# Allegro board MB1046.brd
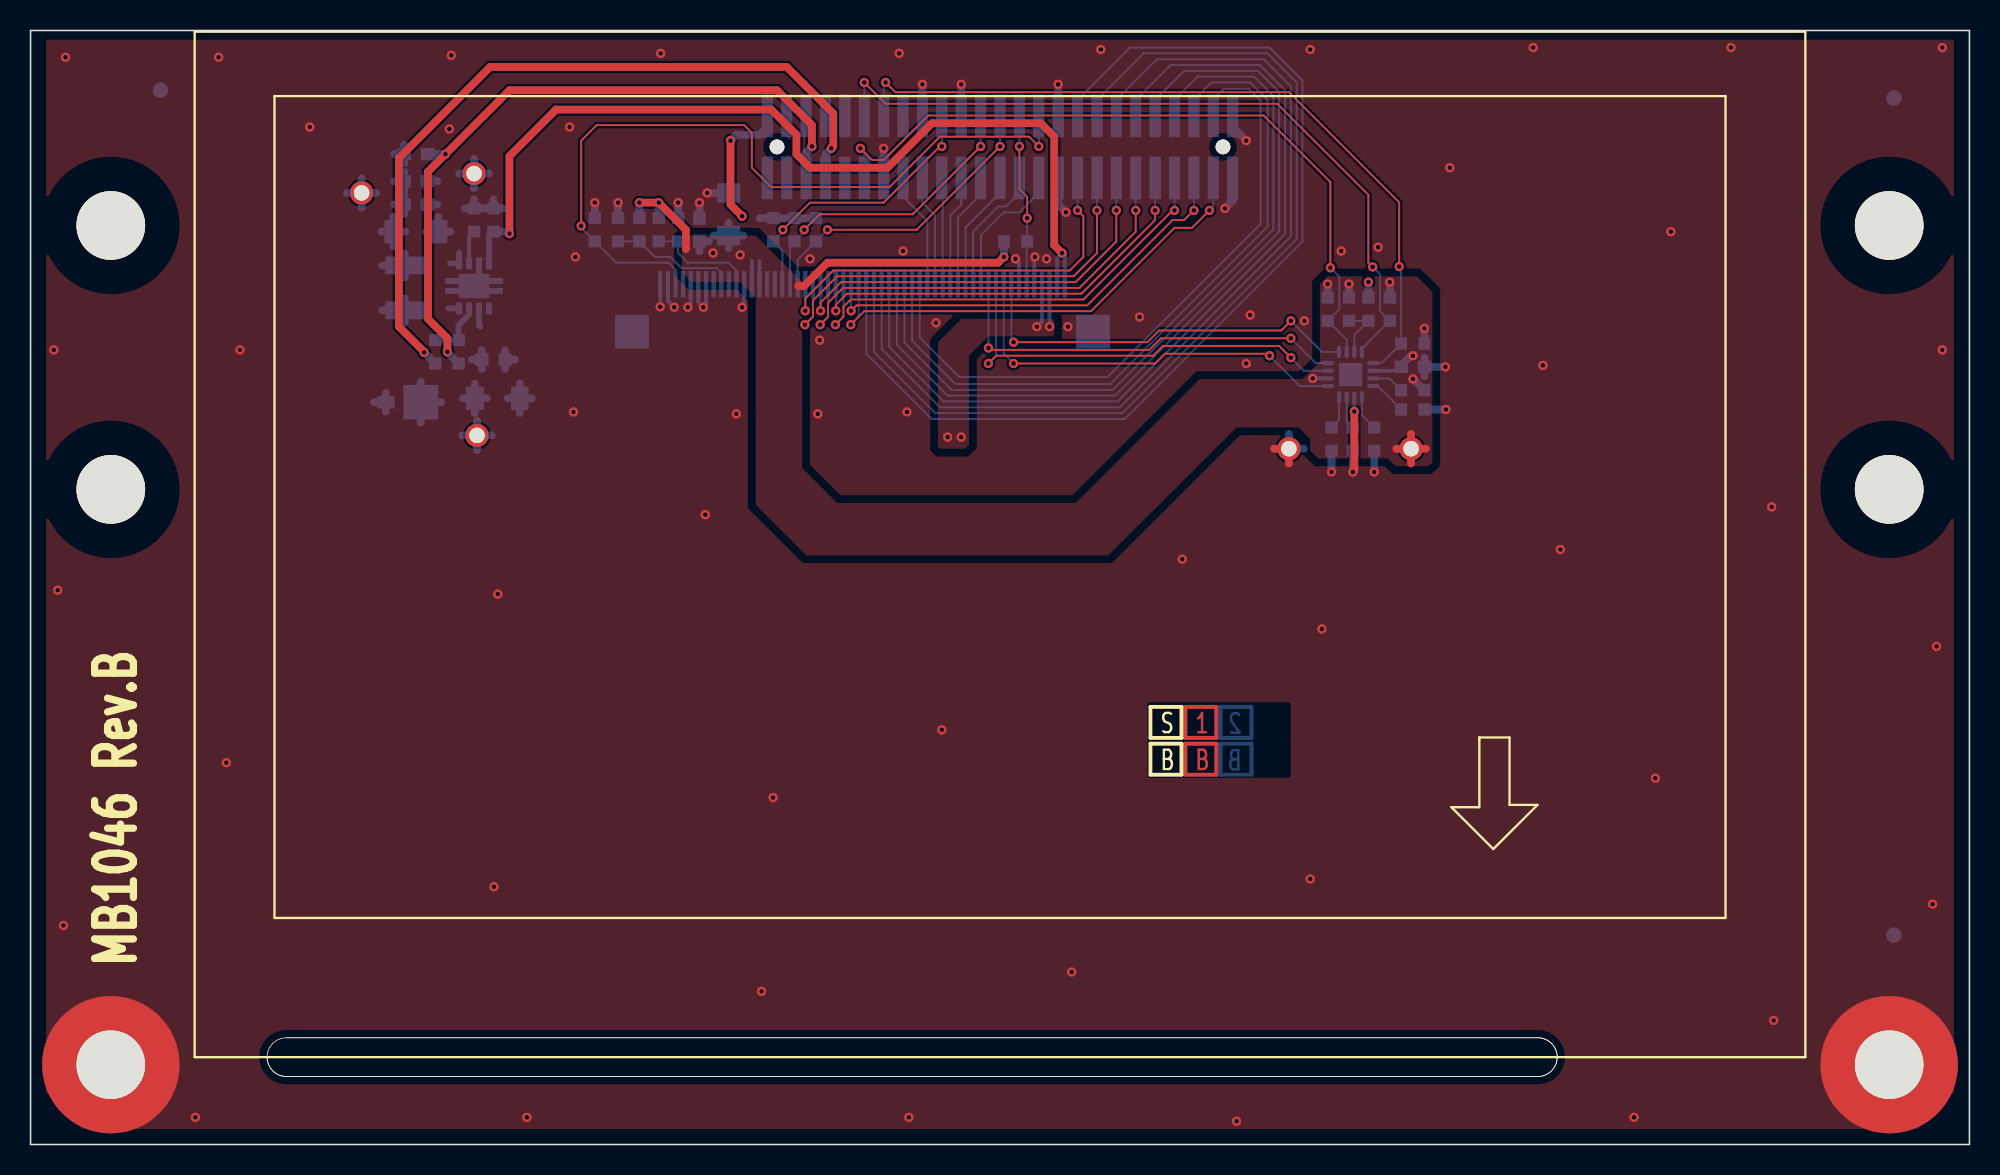
[diagram p0: board, top side]
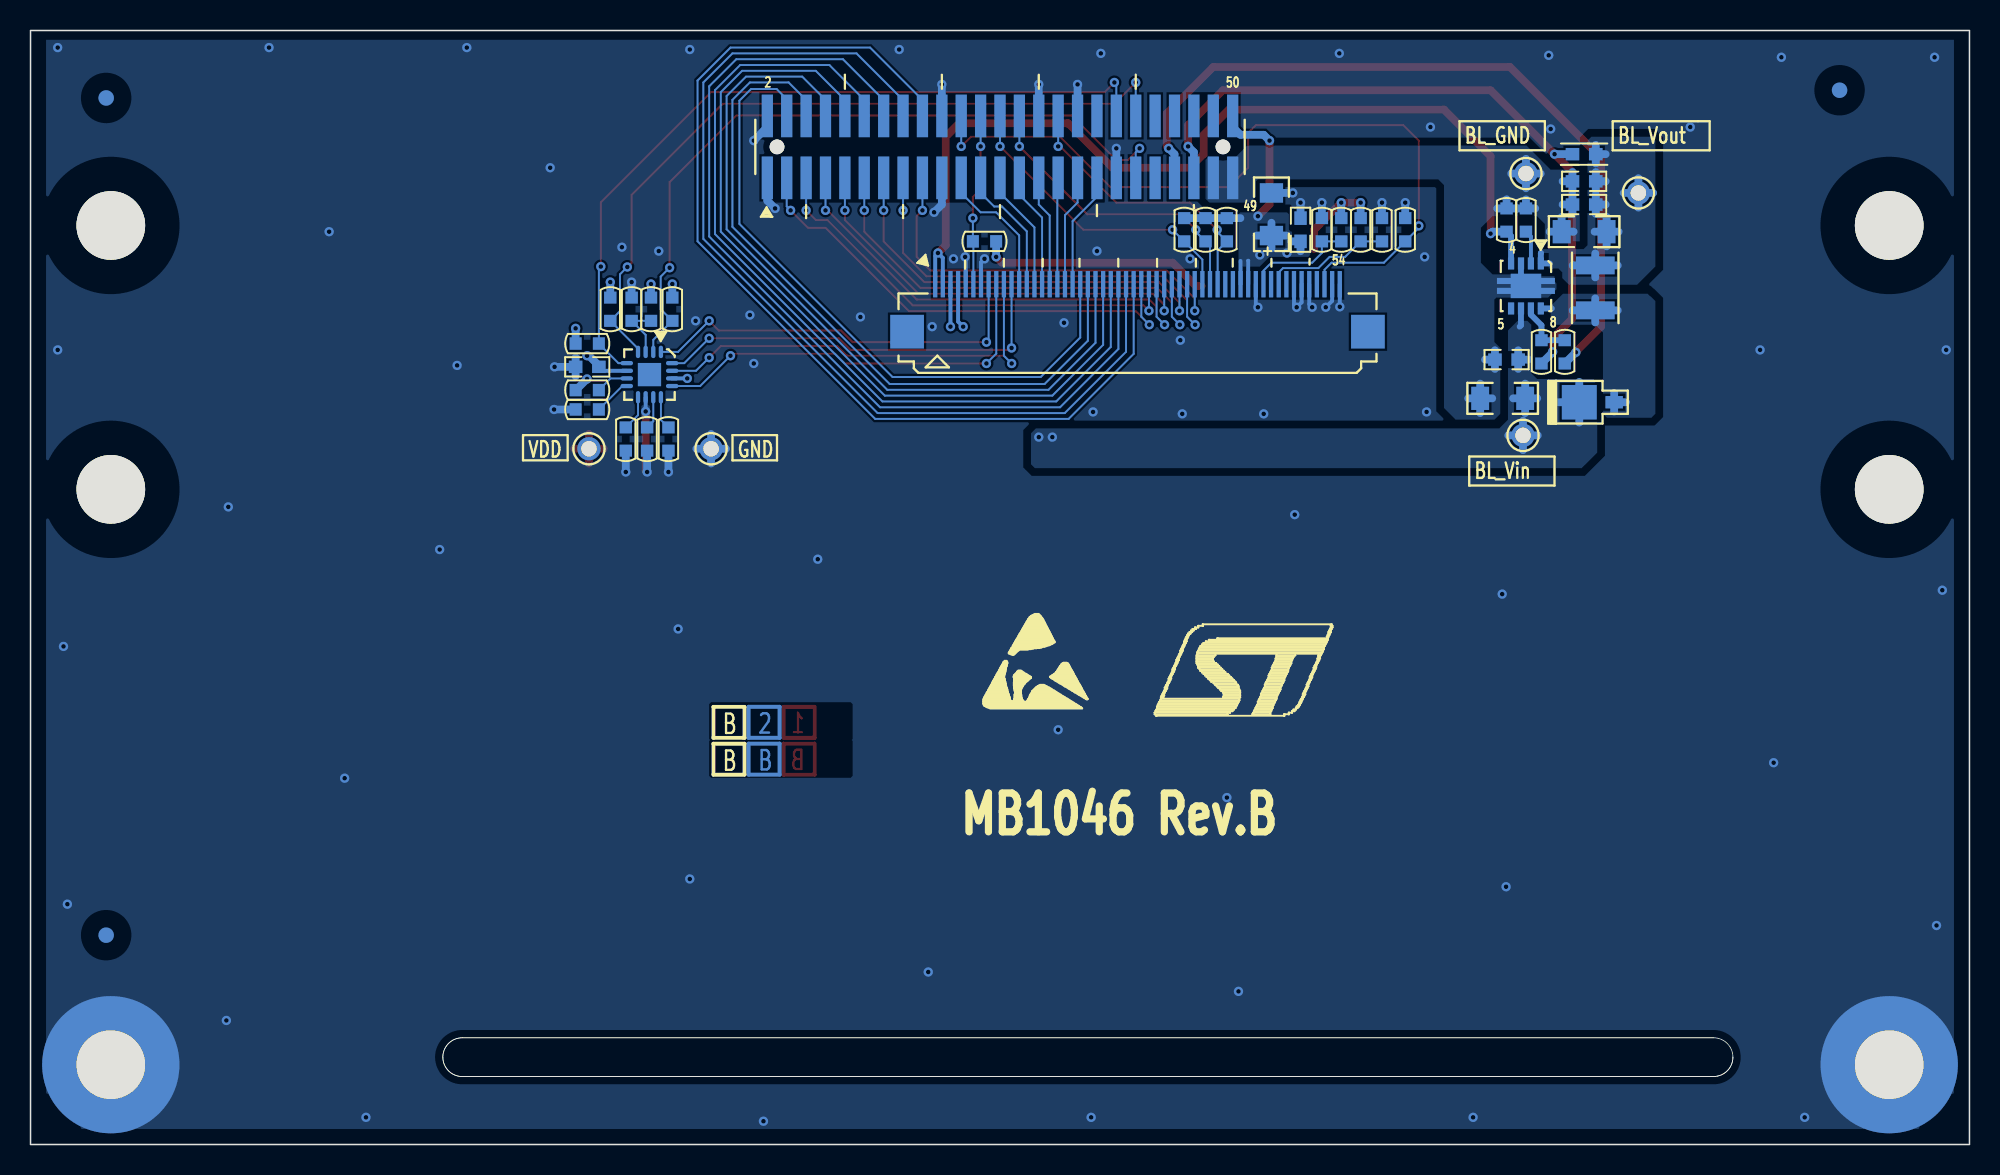
[diagram p1: board, bottom side, seen from below]

Outline 127 x 73 mm; copper layers: TOP, BOTTOM. Coordinates in mm from the lower left corner of the outline.
Outline path: rectangle 0,0 127,73 ; 15.49,5.72 arc(15.87,6.62) 16.76,6.99 ; 15.49,5.72 arc(15.87,4.83) 16.76,4.45 ; 15.49,5.72 arc(15.87,4.83) 16.76,4.45 ; 16.76,6.99 98.72,6.99 ; 16.76,6.99 98.72,6.99 ; 98.72,6.99 arc(99.62,6.62) 99.99,5.72 ; 98.72,6.99 arc(99.62,6.62) 99.99,5.72 ; 16.76,4.45 98.72,4.45 ; 16.76,4.45 98.72,4.45 ; 98.72,4.45 arc(99.62,4.83) 99.99,5.72 ; 98.72,4.45 arc(99.62,4.83) 99.99,5.72 ; 0,73 127,73 127,0 0,0 0,73

## Placement (name value [footprint] x y rotation side)
C1  4.7uF  [TAN-A]  45.72 60.96 270 bottom
C2  100nF  [0603C]  43.81 59.94 270 bottom
C3  4.7uF_50V  [1206C]  30.57 48.9 0 bottom
C4  10nF  [0603C]  30.32 51.44 180 bottom
C5  100nF  [0603C]  25.24 63.12 180 bottom
C6  10nF  [0603C]  25.24 61.59 180 bottom
C7  4.7uF_10V  [1206C]  25.24 59.82 0 bottom
C8  100nF  [0603C]  90.54 50.96 0 bottom
CN1  089H54-000000-G2-C  [FPC54_0R5_089H54_LY-FPC]  67.74 56.52 180 bottom
CN2  P127B-2_25MGF-079-1A  [FTSH-125-01-F-DV]  63.5 65.37 180 bottom
H1  POSITION HOLE  [HOLE_C9D4R5]  121.74 5.23 0 top
H2  POSITION HOLE  [HOLE_C9D4R5]  5.26 5.23 0 top
L1  BEAD  [0603L]  25.24 64.9 180 bottom
L2  4.7uH(1A)  [L1210]  24.51 56.13 270 bottom
NOREF  -  []  74.17 24.54 0 top
NOREF#2  -  []  4.06 -24.89 0 top
NOREF#3  Value  []  63.5 39.32 0 top
NOREF#4  -  [unnamed#2]  121.74 60.23 0 top
NOREF#5  -  [unnamed#2]  121.74 42.93 0 top
NOREF#6  -  []  371.09 -81.28 0 top
NOREF#7  -  [unnamed#2]  5.26 60.23 0 top
NOREF#8  -  []  0 0 0 top
NOREF#9  -  []  256.16 131.06 0 top
NOREF#10  -  []  74.17 26.95 0 top
NOREF#11  -  [unnamed#2]  5.26 42.93 0 top
NOREF#12  -  []  246 77.72 0 top
NOREF#13  -  [unnamed#3]  122.05 68.58 180 bottom
NOREF#14  -  [unnamed#3]  122.05 13.72 180 bottom
NOREF#15  -  [unnamed#3]  8.51 69.09 180 bottom
R1  4K7  [0603R]  48.64 59.94 270 bottom
R2  4K7  [0603R]  51.44 59.94 270 bottom
R3  4K7  [0603R]  50.04 59.94 270 bottom
R4  4K7  [0603R]  41.15 59.94 270 bottom
R5  4K7  [0603R]  39.88 59.94 270 bottom
R6  [N_A]  [0603R]  42.42 59.94 90 bottom
R7  [N_A]  [0603R]  38.48 59.94 90 bottom
R8  4K7  [0603R]  36.96 59.94 90 bottom
R9  4K7  [0603R]  64.52 59.18 0 bottom
R10  0  [0603R]  26.51 51.94 270 bottom
R11  100K  [0603R]  29.05 60.58 90 bottom
R12  10  [0603R]  30.32 60.58 270 bottom
R13  4K7  [0603R]  28.03 51.94 270 bottom
R14  [N_A]  [0603R]  90.54 52.48 0 bottom
R15  [N_A]  [0603R]  89.03 54.74 90 bottom
R16  4K7  [0603R]  84.96 54.74 270 bottom
R17  100K  [0603R]  85.22 46.23 90 bottom
R18  100K  [0603R]  86.61 46.23 90 bottom
R19  4K7  [0603R]  90.54 49.44 0 bottom
R20  100K  [0603R]  88.01 46.23 90 bottom
R21  [N_A]  [0603R]  86.36 54.74 90 bottom
R22  100K  [0603R]  90.54 48.17 180 bottom
R23  4K7  [0603R]  87.63 54.74 270 bottom
TP1  mco1  [TP]  82.42 45.59 180 bottom
TP2  mco1  [TP]  29.05 63.63 90 bottom
TP3  mco1  [TP]  90.42 45.59 0 bottom
TP4  mco1  [TP]  29.24 46.47 90 bottom
TP5  mco1  [TP]  21.68 62.36 90 bottom
U1  STLD40DPUR  [SON8_0R65_3X3]  29.05 56.26 0 bottom
U2  STMPE811QTR  [QFN16_0R5_3X3]  86.46 50.45 270 bottom
Z1  STPS1L40M  [DO-216AA]  23.27 48.64 0 bottom

## Library data of the parts
C1 = TAN-A
C2 C4-C6 C8 = 0603C
C3 C7 = 1206C
CN1 = FPC54_0R5_089H54_LY-FPC
CN2 = FTSH-125-01-F-DV
H1 H2 = HOLE_C9D4R5
L1 = 0603L
L2 = L1210
R1-R23 = 0603R
TP1-TP5 = TP
U1 = SON8_0R65_3X3
U2 = QFN16_0R5_3X3
Z1 = DO-216AA

## Footprints (pads in the part's own frame, mm; a bottom-side part is the same pattern mirrored in y, then rotated)
0603C
  rect 0.889x0.813 smd: 1(-0.762,0) 2(0.762,0)
0603L
  rect 0.889x0.813 smd: 1(-0.762,0) 2(0.762,0)
0603R
  rect 0.787x0.813 smd: 1(-0.762,0) 2(0.762,0)
1206C
  rect 1.168x1.524 smd: 1(-1.473,0) 2(1.473,0)
DO-216AA
  rect 1.143x0.813 smd: 1(0,0)
  rect 2.286x2.261 smd: 2(2.286,0)
FPC54_0R5_089H54_LY-FPC
  rect 0.279x1.727 smd: 1(0,-0.14) 2(0.5,-0.14) 3(1,-0.14) 4(1.5,-0.14) 5(2,-0.14) 6(2.5,-0.14) 7(3,-0.14) 8(3.5,-0.14) 9(4,-0.14) 10(4.5,-0.14) 11(5,-0.14) 12(5.5,-0.14) 13(6,-0.14) 14(6.5,-0.14) 15(7,-0.14) 16(7.5,-0.14) 17(8,-0.14) 18(8.5,-0.14) 19(9,-0.14) 20(9.5,-0.14) 21(10,-0.14) 22(10.5,-0.14) 23(11,-0.14) 24(11.5,-0.14) 25(12,-0.14) 26(12.5,-0.14) 27(13,-0.14) 28(13.5,-0.14) 29(14,-0.14) 30(14.5,-0.14) 31(15,-0.14) 32(15.5,-0.14) 33(16,-0.14) 34(16.5,-0.14) 35(17,-0.14) 36(17.5,-0.14) 37(18,-0.14) 38(18.5,-0.14) 39(19,-0.14) 40(19.5,-0.14) 41(20,-0.14) 42(20.5,-0.14) 43(21,-0.14) 44(21.5,-0.14) 45(22,-0.14) 46(22.5,-0.14) 47(23,-0.14) 48(23.5,-0.14) 49(24,-0.14) 50(24.5,-0.14) 51(25,-0.14) 52(25.5,-0.14) 53(26,-0.14) 54(26.5,-0.14)
  rect 2.21x2.21 smd: 55(-1.843,-3.25) 56(28.343,-3.25)
FTSH-125-01-F-DV
  round 0.965 hole 0.965 unplated: (-14.605,0) (14.605,0)
  rect 0.737x2.794 smd: 1(-15.24,-2.03) 2(-15.24,2.03) 3(-13.97,-2.03) 4(-13.97,2.03) 5(-12.7,-2.03) 6(-12.7,2.03) 7(-11.43,-2.03) 8(-11.43,2.03) 9(-10.16,-2.03) 10(-10.16,2.03) 11(-8.89,-2.03) 12(-8.89,2.03) 13(-7.62,-2.03) 14(-7.62,2.03) 15(-6.35,-2.03) 16(-6.35,2.03) 17(-5.08,-2.03) 18(-5.08,2.03) 19(-3.81,-2.03) 20(-3.81,2.03) 21(-2.54,-2.03) 22(-2.54,2.03) 23(-1.27,-2.03) 24(-1.27,2.03) 25(0,-2.03) 26(0,2.03) 27(1.27,-2.03) 28(1.27,2.03) 29(2.54,-2.03) 30(2.54,2.03) 31(3.81,-2.03) 32(3.81,2.03) 33(5.08,-2.03) 34(5.08,2.03) 35(6.35,-2.03) 36(6.35,2.03) 37(7.62,-2.03) 38(7.62,2.03) 39(8.89,-2.03) 40(8.89,2.03) 41(10.16,-2.03) 42(10.16,2.03) 43(11.43,-2.03) 44(11.43,2.03) 45(12.7,-2.03) 46(12.7,2.03) 47(13.97,-2.03) 48(13.97,2.03) 49(15.24,-2.03) 50(15.24,2.03)
HOLE_C9D4R5
  round 8.992 hole 4.496: 1(0,0)
L1210
  rect 1.168x2.54 smd: 1(-1.473,0) 2(1.473,0)
QFN16_0R5_3X3
  oval 0.813x0.279 smd: 1(-1.487,0.75) 2(-1.487,0.25) 3(-1.487,-0.25) 4(-1.487,-0.75) 9(1.487,-0.75) 10(1.487,-0.25) 11(1.487,0.25) 12(1.487,0.75)
  oval 0.279x0.813 smd: 5(-0.75,-1.487) 6(-0.25,-1.487) 7(0.25,-1.487) 8(0.75,-1.487) 13(0.75,1.487) 14(0.25,1.487) 15(-0.25,1.487) 16(-0.75,1.487)
  rect 1.524x1.524 smd: 17(0,0)
SON8_0R65_3X3
  rect 0.406x0.787 smd: 1(-0.975,-1.475) 2(-0.325,-1.475) 3(0.325,-1.475) 4(0.975,-1.475) 5(0.975,1.475) 6(0.325,1.475) 7(-0.325,1.475) 8(-0.975,1.475)
  custom 3.8x1.6 smd: 9(0,0)
TAN-A
  rect 1.27x1.524 smd: 1(1.397,0) 2(-1.397,0)
TP
  round 1.524 hole 1.016: 1(0,0)
unnamed#2
  round 4.496 hole 4.496 unplated: (0,0)
unnamed#3
  round 1.016 smd: (0,0)

## Nets
GND: C1.2 C2.1 C8.2 CN1.5 CN1.7 CN1.43 CN1.48 CN1.49 CN1.50 CN1.53 CN1.54 CN2.1 CN2.2 CN2.19 CN2.20 CN2.30 CN2.34 CN2.37 H1.1 H2.1 R6.2 R7.2 R8.2 R17.1 R18.1 R20.1 R22.1 R23.1 TP1.1 U2.10
VDD: C1.1 C2.2 C8.1 CN1.41 CN1.42 CN2.50 R1.1 R2.1 R3.1 R4.1 R5.1 R9.1 R14.2 R15.2 R16.1 R19.2 R21.2 TP3.1 U2.6 U2.14
A: C3.1 C4.2 CN1.3 CN1.4 TP4.1 U1.6 Z1.2
B0: CN1.12 CN2.21
B1: CN1.13 CN2.23
B2: CN1.14 CN2.25
B3: CN1.15 CN2.27
B4: CN1.16 CN2.29
B5: CN1.17 CN2.31
B6: CN1.18 CN2.33
B7: CN1.19 CN2.35
BL_CTRL: CN2.43 R10.2
BLGND: C3.2 C4.1 C5.1 C6.1 C7.2 CN2.47 CN2.49 R11.2 R12.1 TP2.1 U1.3 U1.9
BLVDD: CN2.45 L1.1 R13.2
CLK: CN1.38 CN2.32 R1.2
ENB: CN1.52 CN2.22 R8.1
G0: CN1.20 CN2.4
G1: CN1.21 CN2.6
G2: CN1.22 CN2.8
G3: CN1.23 CN2.10
G4: CN1.24 CN2.12
G5: CN1.25 CN2.14
G6: CN1.26 CN2.16
G7: CN1.27 CN2.18
HSYNC: CN1.36 CN2.26 R2.2
I2C_SCL: CN2.40 R15.1 U2.4
I2C_SDA: CN2.38 R14.1 U2.5
INT: CN2.39 R16.2 U2.2
K: CN1.1 CN1.2 R12.2 U1.4
NETCN1_44: CN1.44 R4.2 R6.1
NETCN1_46: CN1.46 R5.2 R7.1
NETL2_2: L2.2 U1.8 Z1.1
NETR10_1: R10.1 R13.1 U1.7
NETR11_1: R11.1 U1.2
NETR17_2: R17.2 U2.12
NETR18_2: R18.2 U2.11
NETR19_1: R19.1 U2.7
NETR20_2: R20.2 U2.9
NETR21_1: R21.1 R23.2 U2.3
NETR22_2: R22.2 U2.8
ON_OFF: CN1.6 CN2.24 R9.2
R0: CN1.28 CN2.3
R1: CN1.29 CN2.5
R2: CN1.30 CN2.7
R3: CN1.31 CN2.9
R4: CN1.32 CN2.11
R5: CN1.33 CN2.13
R6: CN1.34 CN2.15
R7: CN1.35 CN2.17
VL: C5.2 C6.2 C7.1 L1.2 L2.1 TP5.1 U1.1
VSYNC: CN1.37 CN2.28 R3.2
XL: CN1.11 U2.16
XR: CN1.9 U2.13
YD: CN1.8 U2.1
YU: CN1.10 U2.15

Pads without a net: CN1 39 40 45 47 51 55 56; CN2 36 41 42 44 46 48; U1 5; U2 17

## Via types
v1: diameter 0.61, hole 0.305, TOP to BOTTOM, 151 vias

## Routing (per net, layer and track width the routed paths; a pad name or vN(x,y) marks a point on that pad's centre or on a via; arc(x,y) is an arc through that point)
GND: length 53.3
  TOP w0.508: 82.42,44.63 TP1.1 81.46,45.59 ; v1(86.61,44.07) 86.71,44.16 v1(86.71,48.04)
  BOTTOM w0.254: CN1.7 64.74,57.81 v1(64.52,58.04) ; CN1.54 v1(41.24,54.89) ; CN1.50 43.24,55.06 v1(43.05,54.86) ; v1(42.16,54.86) 41.74,55.28 CN1.53 ; U2.10 v1(86.71,48.04) ; v1(46.61,54.86) 46.74,55 CN1.43 ; CN1.49 43.74,55.19 v1(44.07,54.86) 44.24,55.04 CN1.48 ; v1(65.79,58.17) 65.74,58.12 CN1.5
  BOTTOM w0.508: CN2.37 v1(55.88,65.28) ; CN2.30 v1(60.96,69.47) ; v1(79.63,65.79) 78.74,66.67 CN2.2 ; R22.1 v1(92.71,48.17) ; R7.2 v1(38.48,61.72) ; C2.1 v1(43.81,61.72) ; TP1.1 83.39,45.59 ; TP1.1 82.42,46.56 ; TP1.1 81.46,45.59 ; TP1.1 82.42,44.63 ; R23.1 v1(87.63,56.52) ; R8.2 v1(36.96,61.72) ; R20.1 v1(88.01,44.07) ; CN2.20 v1(67.31,69.47) ; R6.2 v1(42.42,61.72) ; C8.2 91.3,51.57 ; C8.2 91.3,50.35 ; C8.2 v1(92.68,50.96) ; CN2.19 67.31,61.59 v1(67.82,61.09) ; R17.1 v1(85.22,44.07) ; v1(44.32,62.36) C1.2 ; CN2.34 v1(58.42,69.47) ; R18.1 v1(86.61,44.07) ; v1(78.23,61.34) 78.74,61.85 CN2.1
  vias: v1(1.52,52.07) v1(1.78,36.32) v1(2.16,14.35) v1(2.29,71.25) v1(10.79,1.78) v1(12.32,71.25) v1(12.83,25.02) v1(13.72,52.07) v1(18.29,66.67) v1(27.43,66.55) v1(27.56,71.37) v1(30.35,16.89) v1(30.61,36.07) v1(32.51,1.78) v1(35.31,66.67) v1(35.56,48.01) v1(35.69,58.17) v1(41.27,71.5) v1(44.2,41.27) v1(46.23,47.88) v1(47.88,10.03) v1(48.64,22.73) v1(51.05,58.04) v1(51.56,47.88) v1(51.69,52.7) v1(56.9,71.5) v1(57.15,58.55) v1(57.4,48.01) v1(57.53,1.78) v1(59.31,53.85) v1(59.69,27.18) v1(66.55,58.04) v1(67.94,53.59) v1(68.2,11.3) v1(70.1,71.75) v1(72.64,54.23) v1(75.44,38.35) v1(78.99,1.52) v1(79.63,51.18) v1(79.88,54.36) v1(83.44,53.98) v1(83.82,71.75) v1(83.82,17.4) v1(84.58,33.78) v1(85.85,58.55) v1(88.27,58.8) v1(92.96,64.01) v1(98.42,71.88) v1(99.06,51.05) v1(100.2,38.99) v1(105.03,1.78) v1(106.43,24) v1(107.44,59.82) v1(111.38,71.88) v1(114.05,41.78) v1(114.17,8.13) v1(124.59,15.75) v1(124.84,32.64) v1(125.22,71.88) v1(125.22,52.07)
VDD: length 55.5
  TOP w0.508: v1(45.85,65.79) 45.85,61.59 v1(46.61,60.83) ; 89.46,45.59 TP3.1 ; TP3.1 91.39,45.59 ; TP3.1 90.42,46.56 ; TP3.1 90.42,44.63 ; 42.93,58.67 42.93,59.94 v1(41.15,61.72) v1(39.88,61.72) ; 50.29,56.26 50.67,56.26 52.2,57.78 63.37,57.78 v1(63.75,58.17)
  BOTTOM w0.254: 47.24,57.91 CN1.42 ; C8.1 89.52,50.7 U2.6 ; U2.14 v1(83.98,50.2) ; CN1.41 47.74,57.9
  BOTTOM w0.508: CN2.50 48.26,66.67 47.75,66.17 46.23,66.17 v1(45.85,65.79) ; C1.1 45.72,60.4 ; C1.1 45.72,58.72 ; C1.1 46.69,59.56 ; C1.1 44.75,59.56 ; R15.2 v1(89.03,56.52) ; 43.81,58.53 C2.2 44.43,59.18 ; R2.1 R3.1 R1.1 47.75,60.71 ; v1(90.55,50.16) 91.28,49.44 R19.2 ; R9.1 v1(63.75,58.17) ; R14.2 v1(91.3,53.48) ; v1(90.55,51.69) 90.42,51.69 89.77,51.04 C8.1 ; R5.1 v1(39.88,61.72) ; R4.1 v1(41.15,61.72) ; R21.2 v1(86.36,56.39) ; R16.1 v1(84.96,56.39)
  vias: v1(44.7,58.42) v1(46.48,58.29)
A: length 20.2
  BOTTOM w0.254: v1(65.91,53.59) 66.24,53.93 CN1.4 ; CN1.3 v1(66.74,53.59)
  BOTTOM w0.381: 29.46,53.59 29.38,53.68 U1.6
  BOTTOM w0.508: 28.31,48.9 C3.1 ; C3.1 29.89,48.9 ; C3.1 29.1,49.86 ; C3.1 29.1,47.93 ; C4.2 29.56,52.05 ; C4.2 29.56,50.82 ; C4.2 28.91,51.44 ; TP4.1 30.21,46.47 ; TP4.1 29.24,47.43 ; TP4.1 28.28,46.47 ; TP4.1 29.24,45.5 ; Z1.2 26.9,48.64 ; Z1.2 25.56,47.31 ; Z1.2 25.56,49.98
  vias: v1(60.07,46.35) v1(60.96,46.35)
B0: length 9.1
  BOTTOM w0.127: CN2.21 66.04,62.36 64.77,61.09 63.75,61.09 62.24,59.58 CN1.12
B1: length 8.5
  BOTTOM w0.127: CN2.23 64.77,62.36 63.88,61.47 63.37,61.47 61.74,59.84 CN1.13
B2: length 7.9
  BOTTOM w0.127: CN2.25 63.5,62.36 61.24,60.1 CN1.14
B3: length 7.6
  BOTTOM w0.127: CN1.15 60.74,60.74 62.23,62.23 CN2.27
B4: length 7.3
  BOTTOM w0.127: CN2.29 60.96,61.59 60.24,60.88 CN1.16
B5: length 7
  BOTTOM w0.127: CN1.17 59.74,63.29 CN2.31
B6: length 7.3
  BOTTOM w0.127: CN1.18 59.24,60.9 58.42,61.72 CN2.33
B7: length 7.6
  BOTTOM w0.127: CN2.35 57.15,62.1 58.74,60.51 CN1.19
BL_CTRL: length 51.1
  TOP w0.508: v1(52.45,65.28) 52.58,65.41 52.58,67.56 49.53,70.61 30.1,70.61 24.13,64.64 24.13,53.59 25.75,51.98 25.75,51.94 v1(25.78,51.91)
  BOTTOM w0.508: v1(52.45,65.28) 52.07,64.9 CN2.43 ; R10.2 v1(25.78,51.91)
BLGND: length 20.8
  BOTTOM w0.381: U1.9 29.38,56.59 U1.3
  BOTTOM w0.508: C6.1 26.65,61.59 ; C6.1 26,60.98 ; C6.1 26,62.21 ; 28.08,63.63 TP2.1 ; TP2.1 30.02,63.63 ; TP2.1 29.05,64.59 ; TP2.1 29.05,62.66 ; 29.71,61.34 R12.1 ; R12.1 30.93,61.34 ; R12.1 30.32,61.94 ; R11.2 29.66,61.34 ; R11.2 29.05,61.94 ; R11.2 28.44,61.34 ; 32.05,47.93 C3.2 ; C3.2 31.26,48.9 ; C3.2 32.05,49.86 ; C3.2 32.84,48.9 ; 25.93,59.82 C7.2 ; C7.2 26.71,60.78 ; C7.2 27.5,59.82 ; C4.1 31.08,52.05 ; C4.1 31.73,51.44 ; C4.1 31.08,50.82 ; C5.1 26,63.73 ; C5.1 26,62.51 ; C5.1 26.65,63.12
BLVDD: length 46.5
  TOP w0.508: v1(27.3,51.94) 27.3,52.83 26.04,54.1 26.04,63.75 v1(27.18,64.9) 31.37,69.09 48.9,69.09 51.18,66.8 v1(51.18,65.41)
  BOTTOM w0.508: CN2.45 50.8,65.02 v1(51.18,65.41) ; v1(27.3,51.94) 27.3,51.91 R13.2 ; v1(27.18,64.9) L1.1
CLK: length 18.8
  TOP w0.127: v1(49.28,59.94) 51.05,61.72 55.88,61.72 59.56,65.41 v1(59.69,65.41)
  BOTTOM w0.127: CN1.38 49.24,58.58 R1.2 49.28,59.82 v1(49.28,59.94) ; CN2.32 v1(59.69,65.41)
ENB: length 51
  TOP w0.127: v1(36.07,60.2) 36.07,65.79 37.08,66.8 46.74,66.8 47.24,66.29 47.24,64.01 48.51,62.74 56.26,62.74 59.56,66.04 65.41,66.04 v1(66.04,65.41)
  BOTTOM w0.127: CN1.52 42.24,57.32 41.78,57.78 38.35,57.78 R8.1 36.07,60.07 v1(36.07,60.2) ; CN2.22 v1(66.04,65.41)
G0: length 43.9
  BOTTOM w0.127: CN1.20 58.24,52.88 60.83,50.29 70.54,50.29 80.57,60.33 80.57,68.4 79.81,69.16 78.13,69.16 77.47,68.5 CN2.4
G1: length 47.6
  BOTTOM w0.127: CN1.21 57.74,52.67 60.58,49.83 70.73,49.83 81.03,60.14 81.03,68.45 79.88,69.6 77.34,69.6 76.2,68.45 CN2.6
G2: length 51.1
  BOTTOM w0.127: CN1.22 57.24,52.53 60.33,49.45 70.88,49.45 81.41,59.98 81.41,68.71 80.14,69.98 76.45,69.98 74.93,68.45 CN2.8
G3: length 54.5
  BOTTOM w0.127: CN1.23 56.74,52.4 60.07,49.07 71.04,49.07 81.79,59.82 81.79,68.96 80.39,70.36 75.56,70.36 73.66,68.45 CN2.10
G4: length 57.9
  BOTTOM w0.127: CN2.12 72.39,68.45 74.68,70.74 80.52,70.74 82.17,69.09 82.17,59.66 71.2,48.69 59.82,48.69 56.24,52.26 CN1.24
G5: length 61.4
  BOTTOM w0.127: CN1.25 55.74,52.13 59.56,48.31 71.36,48.31 82.55,59.5 82.55,69.34 80.77,71.12 73.79,71.12 71.12,68.45 CN2.14
G6: length 64.9
  BOTTOM w0.127: CN2.16 69.85,68.45 72.9,71.5 81.03,71.5 82.93,69.6 82.93,59.35 71.52,47.93 59.26,47.93 55.24,51.94 CN1.26
G7: length 68.4
  BOTTOM w0.127: CN1.27 54.74,51.81 59,47.55 71.67,47.55 83.31,59.19 83.31,69.72 81.15,71.88 72.01,71.88 68.58,68.45 CN2.18
HSYNC: length 19.9
  TOP w0.127: v1(63.5,65.41) 58.04,59.94 v1(52.2,59.94)
  BOTTOM w0.127: CN1.36 50.24,57.99 R2.2 v1(52.2,59.94) ; CN2.26 v1(63.5,65.41)
I2C_SCL: length 49.9
  TOP w0.127: v1(54.61,69.6) 56.01,68.2 81.66,68.2 87.63,62.23 87.63,57.78 v1(87.91,57.51)
  BOTTOM w0.127: v1(87.91,57.51) 88.39,57.02 88.39,54.61 R15.1 87.21,52.16 U2.4 ; v1(54.61,69.6) CN2.40
I2C_SDA: length 50.8
  TOP w0.127: v1(56.01,69.6) 56.64,68.96 82.42,68.96 89.65,61.74 v1(89.65,57.53)
  BOTTOM w0.127: U2.5 88.49,51.2 R14.1 89.77,57.4 v1(89.65,57.53) ; CN2.38 55.88,69.47 v1(56.01,69.6)
INT: length 48.4
  TOP w0.127: v1(85.14,57.45) 85.14,63.07 80.77,67.44 58.8,67.44 55.88,64.52 55.12,64.52 v1(54.36,65.28)
  BOTTOM w0.127: v1(54.36,65.28) 54.61,65.02 CN2.39 ; U2.2 86.21,52.73 R16.2 85.72,54.74 85.72,56.87 v1(85.14,57.45)
K: length 61.4
  TOP w0.508: v1(67.56,58.42) 67.06,58.93 67.06,66.04 66.17,66.93 59.05,66.93 56.13,64.01 51.05,64.01 50.16,64.9 50.16,66.17 48.51,67.82 34.42,67.82 31.37,64.77 v1(31.37,59.69)
  BOTTOM w0.254: CN1.1 67.74,58.24 v1(67.56,58.42) 67.24,58.1 CN1.2
  BOTTOM w0.381: U1.4 30.03,59.52 R12.2
  BOTTOM w0.508: v1(31.37,59.69) 31.24,59.82 R12.2
NETCN1_44: length 7.2
  BOTTOM w0.127: CN1.44 46.24,57.26 45.72,57.78 43.05,57.78 42.42,58.42 R6.1 R4.2
NETCN1_46: length 8.4
  BOTTOM w0.127: R7.1 R5.2 40.89,58.17 41.91,58.17 42.65,57.43 44.96,57.43 45.24,57.15 CN1.46
NETL2_2: length 7.2
  BOTTOM w0.381: U1.8 27.35,54.79
  BOTTOM w0.508: Z1.1 23.27,49.25 ; Z1.1 22.5,48.64 ; Z1.1 23.27,48.03 ; L2.2 25.98,54.66 ; L2.2 24.51,55.45 ; L2.2 23.04,54.66 ; L2.2 24.51,53.87
NETR10_1: length 3.9
  BOTTOM w0.381: R10.1 R13.1 28.03,53.69 28.72,54.38 U1.7
NETR11_1: length 2.2
  BOTTOM w0.254: R11.1 28.72,59.49 U1.2
NETR17_2: length 2.2
  BOTTOM w0.127: U2.12 85.71,47.48 R17.2
NETR18_2: length 2.1
  BOTTOM w0.127: R18.2 86.21,47.39 U2.11
NETR19_1: length 2.1
  BOTTOM w0.127: U2.7 89.01,50.2 R19.1
NETR20_2: length 2.3
  BOTTOM w0.127: U2.9 87.21,47.79 R20.2
NETR21_1: length 3.7
  BOTTOM w0.127: U2.3 86.71,53.05 R23.2 R21.1
NETR22_2: length 2.5
  BOTTOM w0.127: R22.2 88.24,49.7 U2.8
ON_OFF: length 11.2
  TOP w0.127: v1(65.28,60.71) 65.28,62.1 64.77,62.61 v1(64.77,65.41)
  BOTTOM w0.127: CN2.24 v1(64.77,65.41) ; CN1.6 65.24,59.02 R9.2 v1(65.28,60.71)
R0: length 31.7
  TOP w0.127: v1(53.72,53.72) 54.61,54.61 69.47,54.61 74.93,60.07 76.07,60.07 v1(77.22,61.21)
  BOTTOM w0.127: v1(77.22,61.21) 77.47,61.47 CN2.3 ; CN1.28 54.24,54.24 v1(53.72,53.72)
R1: length 29.1
  TOP w0.127: v1(53.74,54.63) 54.1,54.99 69.22,54.99 74.8,60.58 75.56,60.58 v1(76.2,61.21)
  BOTTOM w0.127: CN1.29 v1(53.74,54.63) ; v1(76.2,61.21) CN2.5
R2: length 30.7
  TOP w0.127: v1(52.72,53.72) 53.24,54.24 53.24,54.89 53.72,55.37 68.96,55.37 74.8,61.21 v1(74.93,61.21)
  BOTTOM w0.127: v1(52.72,53.72) 53.24,54.24 CN1.30 ; v1(74.93,61.21) CN2.7
R3: length 28.1
  TOP w0.127: v1(52.74,54.63) 52.74,55.03 53.47,55.75 68.83,55.75 73.66,60.58 v1(73.66,61.21)
  BOTTOM w0.127: CN1.31 v1(52.74,54.63) ; v1(73.66,61.21) CN2.9
R4: length 30.1
  TOP w0.127: v1(51.72,53.72) 52.24,54.24 52.24,55.16 53.21,56.13 68.71,56.13 72.39,59.82 v1(72.39,61.21)
  BOTTOM w0.127: v1(51.72,53.72) 52.24,54.24 CN1.32 ; v1(72.39,61.21) CN2.11
R5: length 27.5
  TOP w0.127: v1(51.74,54.63) 51.74,55.17 53.09,56.52 68.45,56.52 71.12,59.18 v1(71.12,61.21)
  BOTTOM w0.127: CN1.33 v1(51.74,54.63) ; v1(71.12,61.21) CN2.13
R6: length 29.5
  TOP w0.127: v1(69.85,61.21) 69.85,58.42 68.33,56.9 52.83,56.9 51.25,55.31 51.25,54.25 v1(50.72,53.72)
  BOTTOM w0.127: v1(50.72,53.72) 51.24,54.24 CN1.34 ; v1(69.85,61.21) CN2.15
R7: length 27.2
  TOP w0.127: v1(50.74,54.63) 50.74,55.44 52.58,57.28 68.07,57.28 68.96,58.17 68.96,60.83 v1(68.58,61.21)
  BOTTOM w0.127: v1(68.58,61.21) CN2.17 ; CN1.35 v1(50.74,54.63)
VL: length 18.8
  BOTTOM w0.381: 27.48,57.74 U1.1 28.07,58.41 28.07,58.42
  BOTTOM w0.508: C7.1 24.55,59.82 ; C7.1 22.98,59.82 ; C7.1 23.77,58.85 ; C7.1 23.77,60.78 ; C6.2 24.48,62.21 ; C6.2 23.83,61.59 ; C6.2 24.48,60.98 ; 23.04,57.61 L2.1 ; L2.1 24.51,56.82 ; L2.1 25.98,57.61 ; L2.1 24.51,58.4 ; C5.2 24.48,63.73 ; C5.2 24.48,62.51 ; C5.2 23.83,63.12 ; TP5.1 22.65,62.36 ; TP5.1 21.68,61.39 ; TP5.1 20.72,62.36 ; TP5.1 21.68,63.32 ; 23.83,64.9 L1.2 ; L1.2 24.48,64.29 ; L1.2 24.48,65.51
VSYNC: length 19.8
  TOP w0.127: v1(50.67,59.94) 51.69,60.96 57.78,60.96 v1(62.23,65.41)
  BOTTOM w0.127: CN2.28 v1(62.23,65.41) ; CN1.37 49.74,58.89 R3.2 50.67,59.82 v1(50.67,59.94)
XL: length 27.4
  TOP w0.127: v1(62.74,52.2) 62.87,52.07 73.28,52.07 74.04,52.83 v1(82.55,52.83)
  BOTTOM w0.127: U2.16 84.18,51.2 v1(82.55,52.83) ; v1(62.74,52.2) CN1.11
XR: length 27.2
  TOP w0.127: v1(81.15,51.69) 81.03,51.82 74.3,51.82 73.66,51.18 v1(64.39,51.18)
  BOTTOM w0.127: v1(81.15,51.69) 83.14,49.7 U2.13 ; v1(64.39,51.18) 63.74,51.83 CN1.9
YD: length 26.6
  TOP w0.127: v1(82.55,53.98) 81.92,53.34 73.91,53.34 73.15,52.58 v1(64.39,52.58)
  BOTTOM w0.127: CN1.8 64.24,52.72 v1(64.39,52.58) ; U2.1 84.59,51.94 v1(82.55,53.98)
YU: length 28.8
  TOP w0.127: v1(82.55,51.56) 81.79,52.32 74.17,52.32 73.53,51.69 63.25,51.69 v1(62.74,51.18)
  BOTTOM w0.127: v1(82.55,51.56) 83.41,50.7 U2.15 ; CN1.10 63.24,51.69 v1(62.74,51.18)

## Copper pours and planes (outline as drawn; the poured copper is in the pictures)
GND on TOP: 1.02,1.02 125.98,1.02 125.98,72.39 1.02,72.39 ; 3 cut-outs
GND on BOTTOM: 1.02,1.02 125.98,1.02 125.98,72.39 1.02,72.39 ; 12 cut-outs
VDD on TOP: 84.96,56.9 90.81,56.9 91.82,55.88 91.82,44.7 91.57,44.45 89.41,44.45 88.9,44.96 84.33,44.96 83.82,45.47 83.82,46.23 83.06,46.99 78.99,46.99 70.61,38.61 50.8,38.61 47.5,41.91 47.5,55.5 46.48,56.52 43.31,56.52 42.67,57.15 42.67,59.44 42.8,59.56 47.5,59.56 50.55,56.52 50.55,44.32 52.83,42.04 68.45,42.04 76.58,50.16 83.31,50.16 84.45,51.31 84.45,56.39
VDD on BOTTOM: 43.31,59.82 44.45,59.82 44.58,59.94 44.58,60.96 44.7,61.09 47.75,61.09 47.88,60.96 47.88,57.78 47.62,57.53 46.48,57.53 45.85,58.17 43.31,58.17 43.18,58.29 43.18,59.69
A on TOP: 60.96,54.1 66.93,54.1 67.06,53.98 67.06,53.09 66.93,52.96 62.74,52.96 61.47,51.69 61.47,45.85 61.21,45.59 59.56,45.59 59.44,45.72 59.44,52.58
A on BOTTOM: 24.38,49.91 24.38,45.34 25.4,44.32 61.21,44.32 61.47,44.58 61.47,46.61 61.15,46.93 30.8,46.93 30.23,47.5 30.23,53.34 29.59,53.98 28.96,53.98 28.7,53.72 28.7,50.55 28.32,50.16 24.64,50.16
BLGND on BOTTOM: 31.11,47.5 30.61,48.01 30.61,52.07 31.11,52.58 31.11,55.37 30.99,55.5 27.3,55.5 27.05,55.75 27.05,56.9 27.18,57.02 31.24,57.02 32,57.78 32,60.07 31.24,60.83 28.32,60.83 27.81,60.33 27.81,59.18 27.69,59.05 25.65,59.05 25.53,59.18 25.53,63.63 25.78,63.88 27.43,63.88 29.02,65.47 47.31,65.47 48.13,64.64 49.91,64.64 50.04,64.52 50.04,61.98 49.78,61.72 47.12,61.72 46.74,62.1 46.74,63.12 46.61,63.25 34.8,63.25 34.42,62.87 34.42,48.26 33.66,47.5
NETL2_2 on BOTTOM: 23.75,47.62 20.83,47.62 20.57,47.88 20.57,55.27 20.88,55.58 20.9,55.58 21.08,55.75 26.62,55.75 27.43,54.94 27.43,54.1 27.05,53.72 24.51,53.72 24,53.21 24,47.88
VL on BOTTOM: 28.19,58.55 28.19,58.42 27.56,58.42 27.56,57.4 26.92,57.4 26.67,57.15 26.67,56.77 26.24,56.34 21.77,56.34 20.57,57.53 20.57,65.79 20.83,66.04 24.77,66.04 25.02,65.79 25.02,58.93 25.27,58.67 28.07,58.67

## Text on the board
Ref Des/Silkscreen Bottom: BL_Vout | BL_Vin | BL_GND | GND | VDD | MB1046 Rev.B
Ref Des/Silkscreen Top: MB1046 Rev.B
User.8: FIGURE | SIZE | 12.0 | 40.0 | 177.0 | 38.0 | TOLERANCE | +3.0/-3.0 | +2.0/-2.0 | DRILL CHART: TOP to BOTTOM | ALL UNITS ARE IN MILS | PLATED | NON-PLATED | ROTATION | - | QTY | 151 | 5 | 2 | 4 | 164 | TOTAL HOLES:
